# Altium PCB DriverControlsCarrierboard.PcbDoc
Units mm, origin at the board's own origin, x right, y up, seen from the top; angles counter-clockwise.
Board outline 50 x 50 mm, 2 copper layers (Top Layer, Bottom Layer); 12 components, 10 nets, 91 pads, 15 vias.
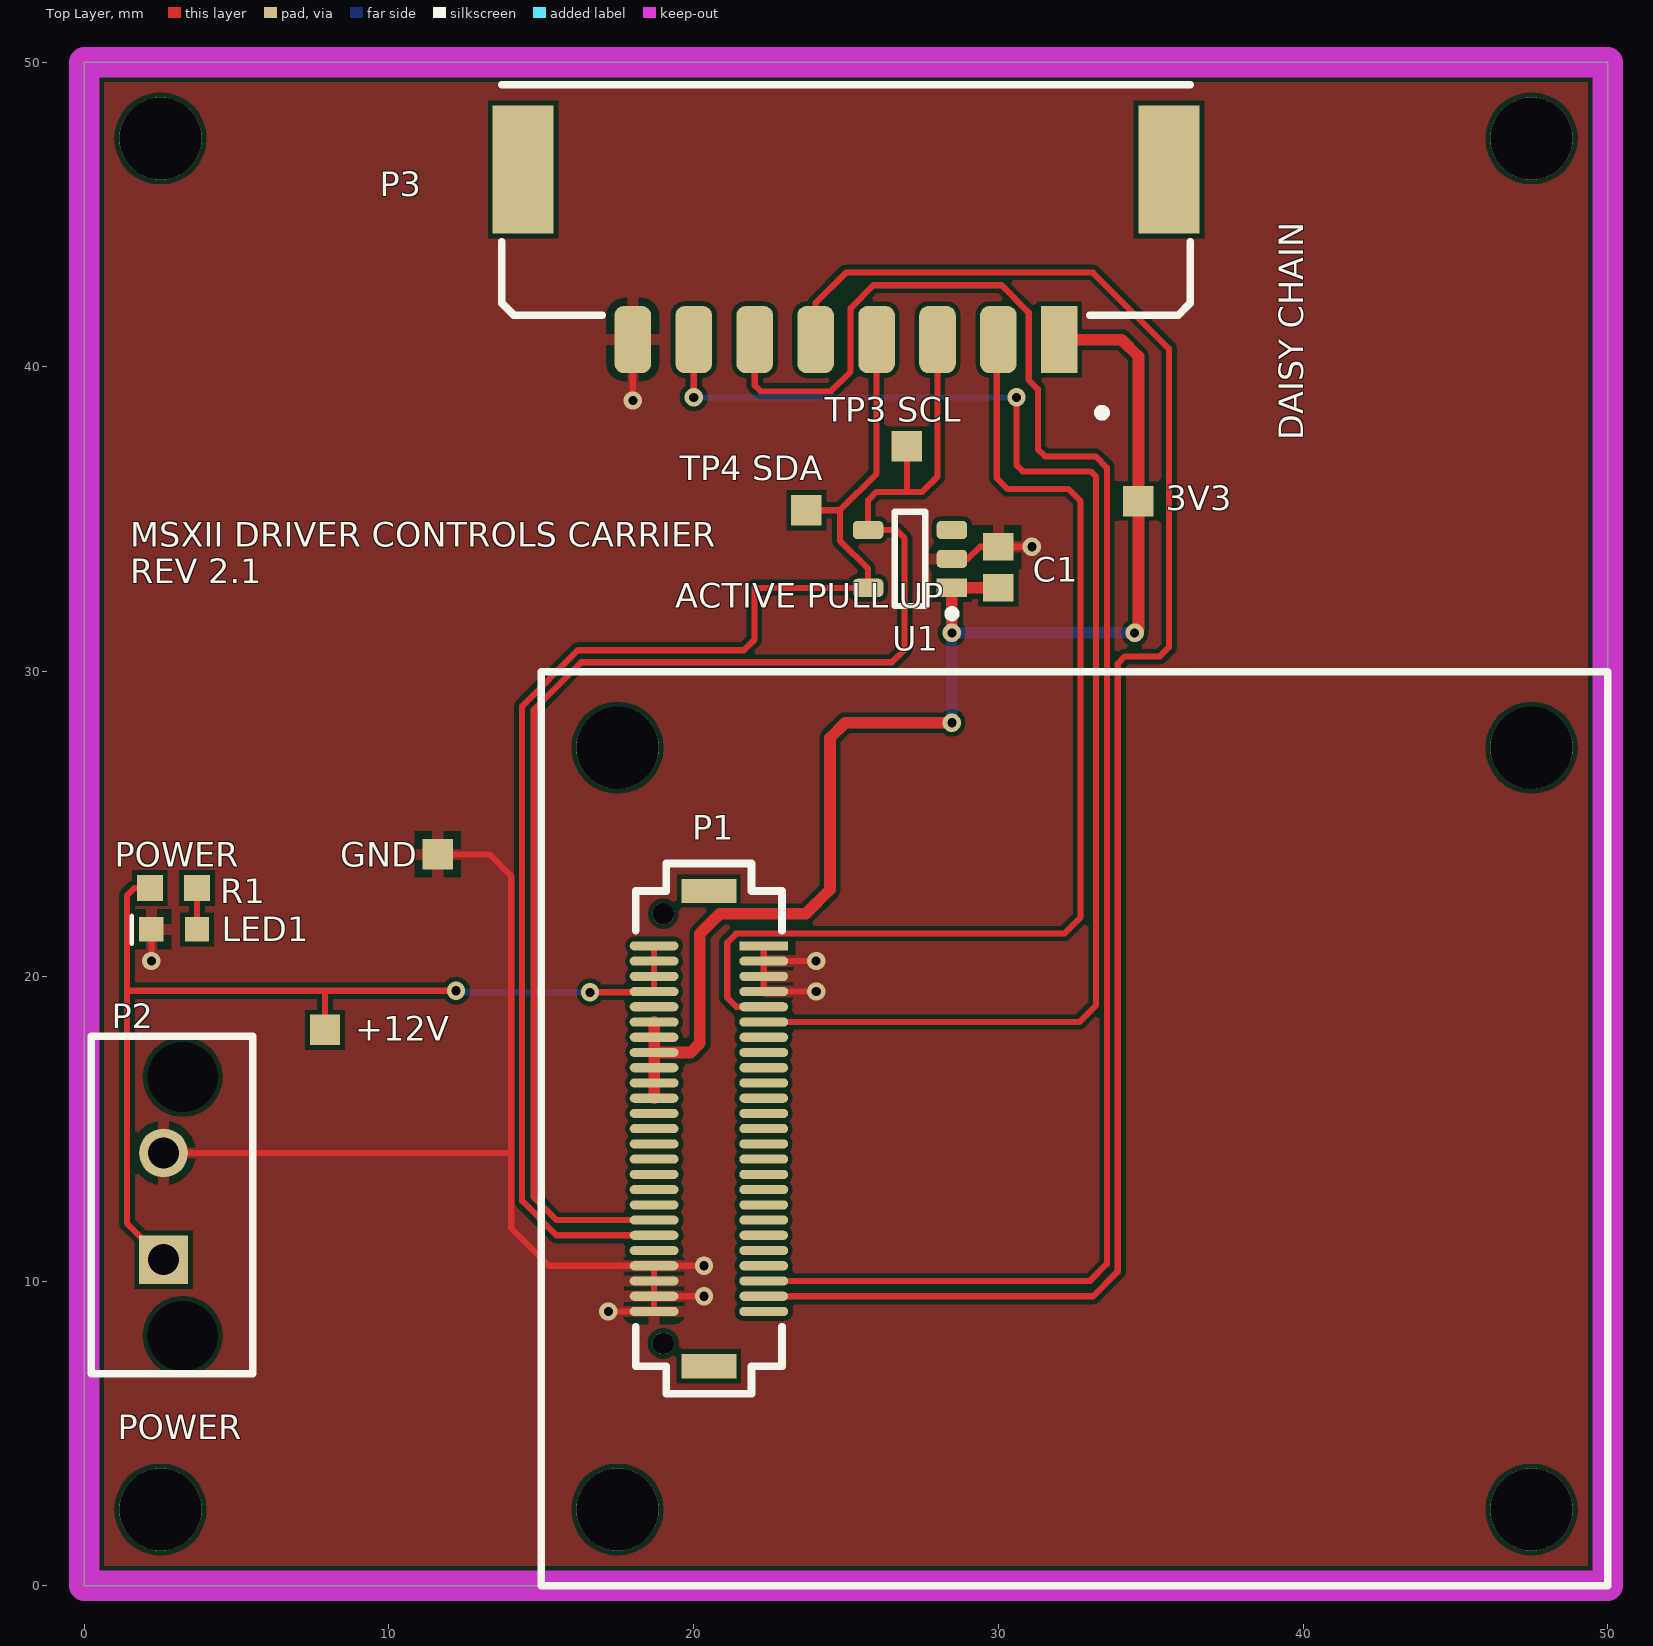
[diagram p0: Top Layer view]
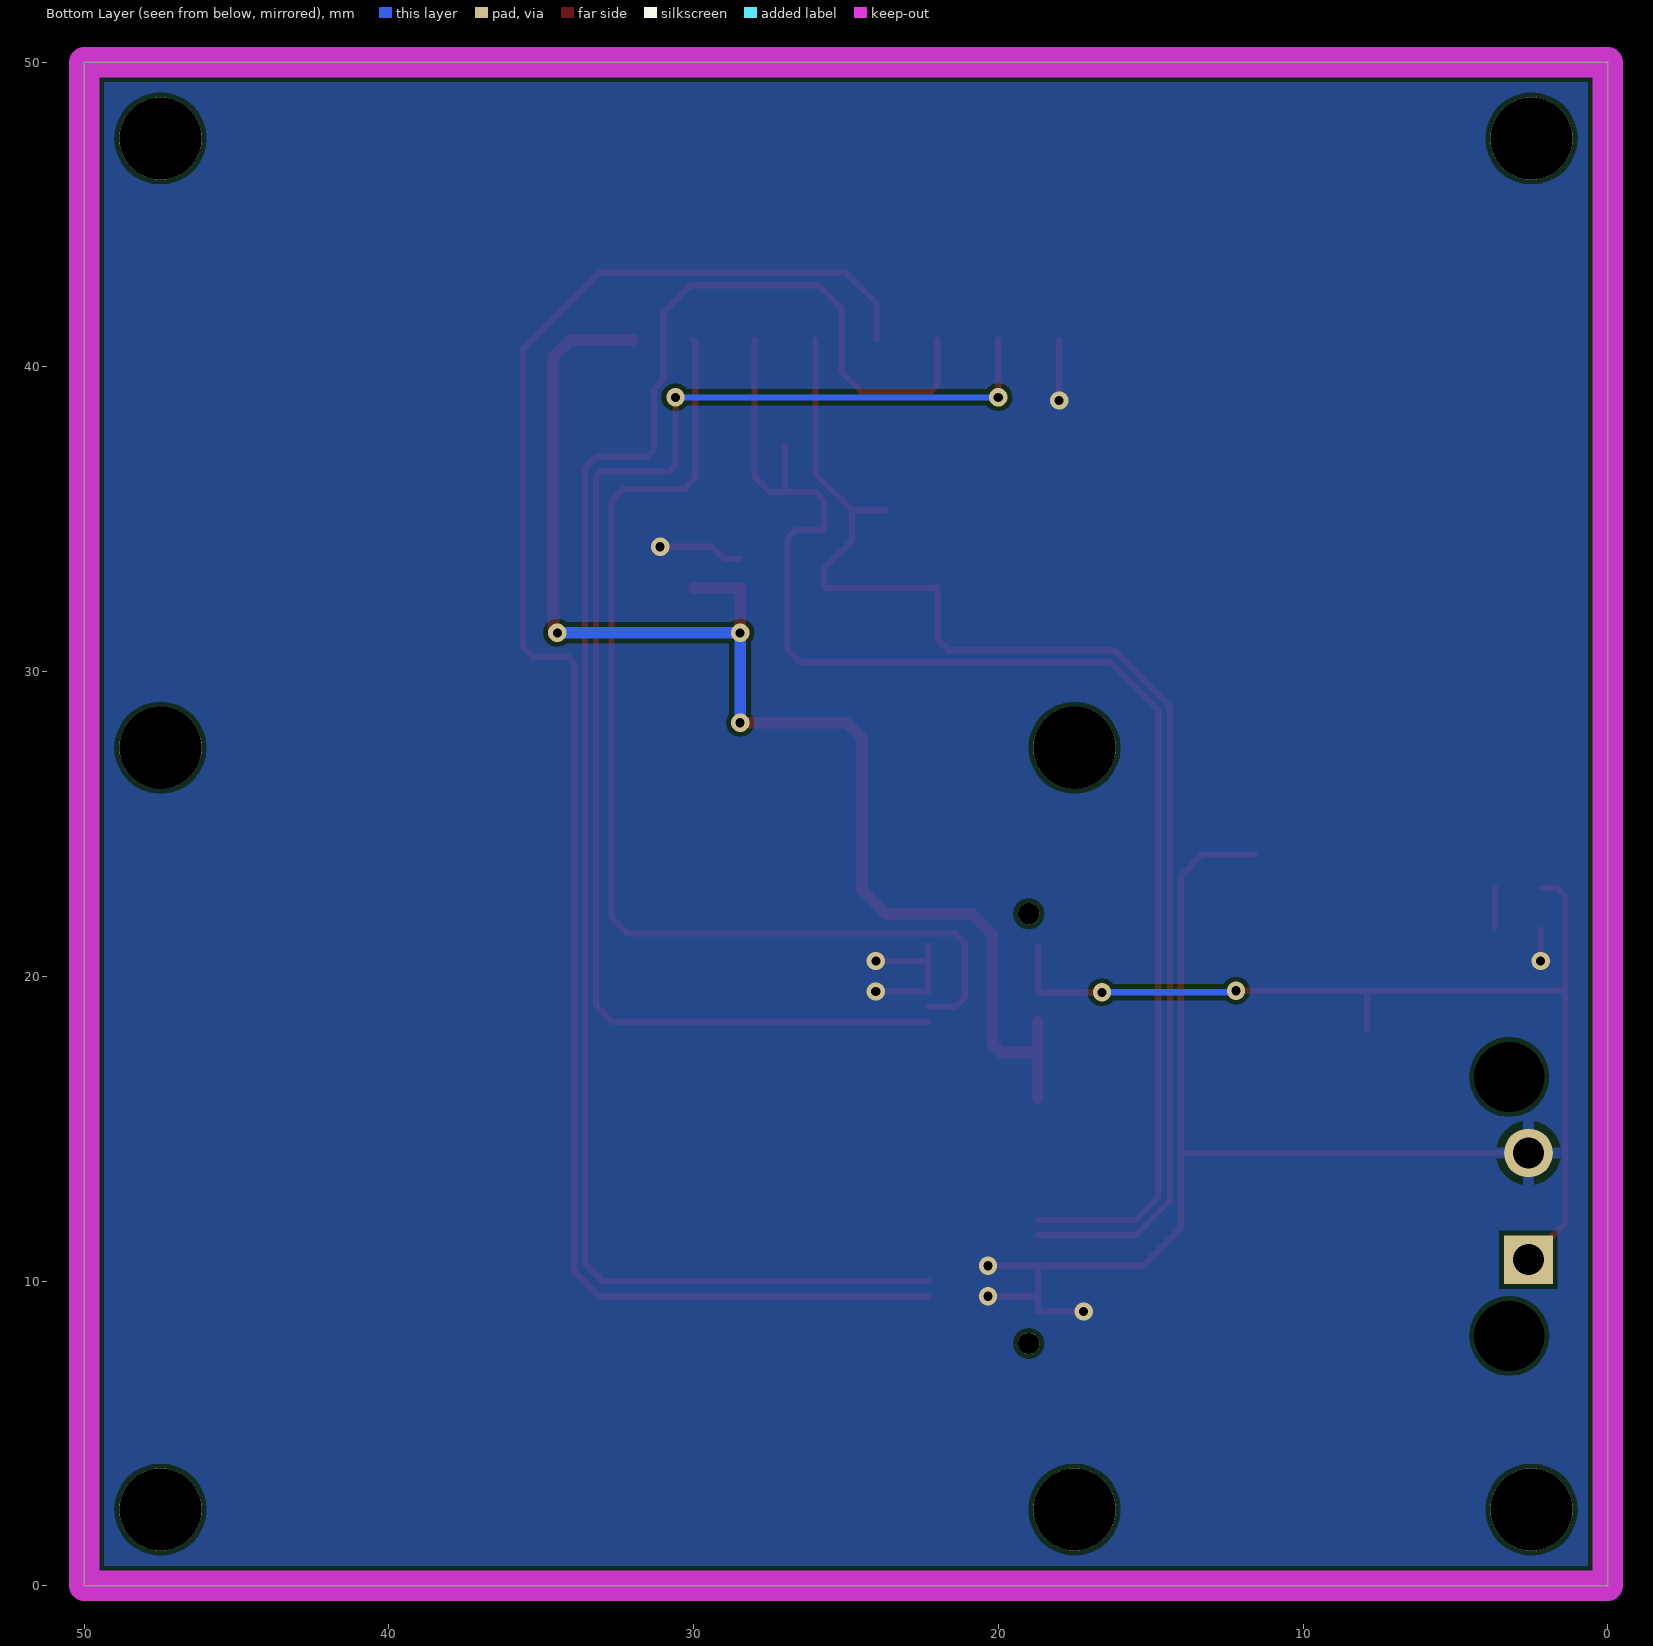
[diagram p1: Bottom Layer view, seen from below]
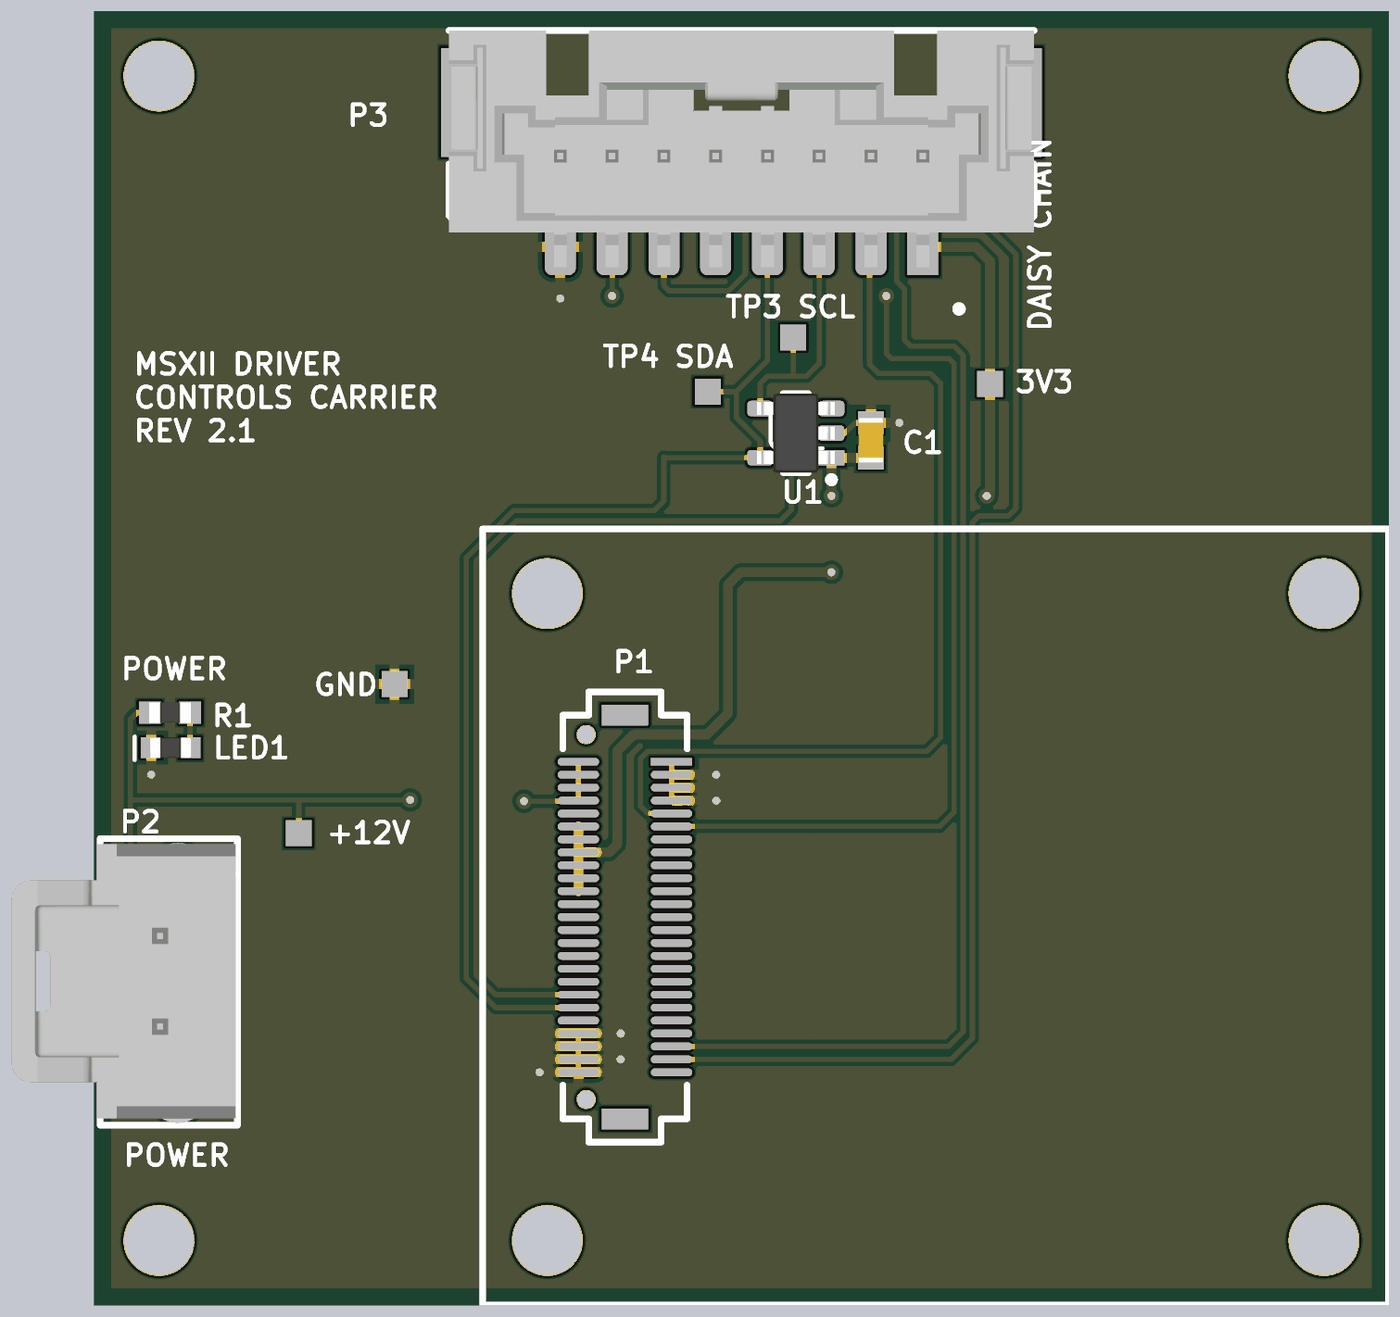
[diagram p2: 3D render of the assembled board from above, using the file's embedded part models]

## Layer stack, top to bottom
Top Solder: solder mask 0.0102, Solder Resist, Dk 3.5
Top Layer: signal copper 0.0356
Dielectric 1: dielectric 0.32, FR-4, Dk 4.8
Bottom Layer: signal copper 0.0356
Bottom Solder: solder mask 0.0102, Solder Resist, Dk 3.5

## Board outline
0,0 0,50 50,50 50,0

## Design rules (kind name [scope] priority, off if disabled: settings)
Clearance [All] p1: gap=0.152 ignorepadtopadclearanceinfootprint=FALSE except(0: Arc-Hole Track-Hole SMDPad-Hole THPad-Hole Via-Hole Fill-Hole Poly-Hole Region-Hole Text-Hole)
DiffPairsRouting [All] p1: maxlimit=0.254 minlimit=0.254 mostfreqgap=0.254 toplayer_minwidth=0.229 toplayer_maxwidth=0.381 toplayer_prefwidth=0.254 bottomlayer_minwidth=0.229 bottomlayer_maxwidth=0.381 bottomlayer_prefwidth=0.254 maxuncoupledlength=12.7
PasteMaskExpansion [All] p1 off: expansion=0
PolygonConnect PolygonConnect_1 [IsPad and not InNet('NetD2_2')and not InNet('NetLED3_2')] p1: connectstyle=Relief reliefconductorwidth=0.381 reliefentries=4 polygonreliefangle="90 Angle" airgapwidth=0.254
PolygonConnect [Not(IsPad) or InNet('NetD2_2')or InNet('NetLED3_2')] p2: connectstyle=Direct reliefconductorwidth=0.254 reliefentries=4 polygonreliefangle="90 Angle" airgapwidth=0.254
RoutingVias [All] p1: holewidth=0.711 width=1.27 viastyle="Through Hole" minholewidth=0.711 minwidth=1.27 maxholewidth=0.711 maxwidth=1.27 useviatemplates=TRUE viatemplateguid#1={48103D11-5043-4B7C-B587-BFCD4296CF47} viatemplatename#1=v60h30m0mx0
SilkToBoardRegionClearance [All] p1 off:
SilkToSilkClearance [All] p1 off: silktosilkclearance=0.254
SilkToSolderMaskClearance [IsPad] p1 off: minsilkscreentomaskgap=0.254 clearancetoexposedcopper=TRUE
SolderMaskExpansion [All] p1: expansion=0.102
Width [All] p1: maxlimit=2.54 minlimit=0.203 preferedwidth=0.203
25 further rules are at their usual default settings.

## Classes and differential pairs
component class DriverControlsCarrierBoardMezzanine: P1

## Components (designator, comment, footprint, x,y, rotation, side; value= is the part's Value field where it differs from the comment)
3V3 "Test Point" "Test Point" 34.6,35.6 r90 top (schematic designator TP2)
+12V "Test Point" "Test Point" 7.9,18.241 r90 top (schematic designator TP1)
"ACTIVE PULL UP" "IC ACCELERATOR I2C 1CH TSOT23-5" "IC OP AMP GP RR 10MHZ SOT-23-5" 27.1,33.7 r180 top (schematic designator U1)
C1 "CAP CER 0.1UF 50V 10% X7R 0603" "CAP, 0603" 30,33.425 r90 top
GND "Test Point" "Test Point" 11.6,24 r0 top (schematic designator TP5)
LED1 "LED GREEN CLEAR 2V 0603" LED_0603 3.65,21.55 r180 top
P1 "CONN 50POS Bergstak Plug 0.02\"" "CONN, Bergstak 50 Pos Plug" 20.5,15 r0 top
P2 "CONN 2POS ULTRA-FIT 0.138\"" "CONN, 2POS ULTRA-FIT" 2.6,10.7 r90 top
P3 "CONN 8POS DURA-CLIK 0.079\"" "CONN, 8POS Dura-Clik" 32.003,40.9 r180 top
R1 "RES 4.7K OHM 1% 1/10W 0603" "RES, 0603" 2.925,22.9 r0 top
"TP3 SCL" "Test Point" "Test Point" 27,37.4 r180 top (schematic designator TP3)
"TP4 SDA" "Test Point" "Test Point" 23.7,35.3 r180 top (schematic designator TP4)

## Footprints (in the part's own frame and the unit in brackets; to place one, negate y for a bottom-side part, rotate by r counter-clockwise, add the part's x,y. Pads: shape width x height; smd on the part's side, far side on the other; paste and mask are expansions set on the pad)
"CAP, 0603" [mm] "Chip Capacitor, 2-Leads, Body 1.60x0.81mm, IPC Medium Density"
  rect 0.9x1 smd mask+0.076: 1(-0.675,0) 2(0.675,0)
  body extent -0.87,-0.48 0.87,0.48, height 0.9
"CONN, 2POS ULTRA-FIT" [mm] "2 Positions Header, Shrouded Connector 0.138\" (3.50mm) Through Hole Gold"
  rect 1.6x1.6 hole 1.02: 1(0,0)
  round 1.6 hole 1.02: 2(3.5,0)
  round 1.6 hole 2.3: ""(-2.5,-0.63) ""(6,-0.63)
  silkscreen extent -3.74,-2.93 7.33,2.37, body extent -3.48,-2.87 7.12,5.79, height 13.85
"CONN, 8POS Dura-Clik" [mm] "WM10868CT-ND"
  rect 1.2x2.2 smd: 1(0,0)
  rrect50% 1.2x2.2 smd: 2(2,0) 3(4,0) 4(6,0) 5(8,0) 6(10,0) 7(12,0) 8(14,0)
  rect 2x4.2 smd: ""(-3.6,-5.58) ""(17.6,-5.58)
  silkscreen extent -4.3,-8.36 18.3,2.53, body extent -4.3,-8.36 18.3,0.79, height 8.02
"CONN, Bergstak 50 Pos Plug" [mm] "Bergstak 50 Position Plug"
  rect 1.6x0.3 smd: 1(1.8,6)
  oval 1.6x0.3 smd: 2(1.8,5.5) 3(1.8,5) 4(1.8,4.5) 5(1.8,4) 6(1.8,3.5) 7(1.8,3) 8(1.8,2.5) 9(1.8,2) 10(1.8,1.5) 11(1.8,1) 12(1.8,0.5) 13(1.8,0) 14(1.8,-0.5) 15(1.8,-1) 16(1.8,-1.5) 17(1.8,-2) 18(1.8,-2.5) 19(1.8,-3) 20(1.8,-3.5) 21(1.8,-4) 22(1.8,-4.5) 23(1.8,-5) 24(1.8,-5.5) 25(1.8,-6) 26(-1.8,-6) 27(-1.8,-5.5) 28(-1.8,-5) 29(-1.8,-4.5) 30(-1.8,-4) 31(-1.8,-3.5) 32(-1.8,-3) 33(-1.8,-2.5) 34(-1.8,-2) 35(-1.8,-1.5) 36(-1.8,-1) 37(-1.8,-0.5) 38(-1.8,0) 39(-1.8,0.5) 40(-1.8,1) 41(-1.8,1.5) 42(-1.8,2) 43(-1.8,2.5) 44(-1.8,3) 45(-1.8,3.5) 46(-1.8,4) 47(-1.8,4.5) 48(-1.8,5) 49(-1.8,5.5) 50(-1.8,6)
  round 0.7 hole 0.7: ""(-1.5,-7.05) ""(-1.5,7.05)
  rect 1.8x0.8 smd: ""(0,-7.8) ""(0,7.8)
  silkscreen extent -2.4,-8.7 2.4,8.7
"IC OP AMP GP RR 10MHZ SOT-23-5" [mm] "SOT23, 5-Leads, Body 2.90x2.80mm, Pitch 0.95mm, IPC Medium Density"
  rect 1x0.6 smd: 1(-1.375,0.95)
  rrect50% 1x0.6 smd: 2(-1.375,0) 3(-1.375,-0.95) 4(1.375,-0.95) 5(1.375,0.95)
  silkscreen extent -1.5,-1.55 0.5,1.92, body extent -1.5,-1.53 1.5,1.53, height 1.45
LED_0603 [mm]
  rect 0.8x0.8 smd: 1(-0.05,0.01) 2(1.45,0.01)
  silkscreen extent 2.09,-0.43 2.09,0.48, body extent -0.1,-0.39 1.5,0.41, height 0.55
"RES, 0603" [mm] "Chip Resistor, 2-Leads, Body 1.60x0.80mm, IPC Medium Density"
  rect 0.85x0.85 smd: 1(-0.775,0) 2(0.775,0)
  body extent -0.8,-0.4 0.8,0.4, height 0.55
"Test Point" [mm]
  rect 1x1 smd: TP(0,0)

## Part data
"ACTIVE PULL UP": "Accelerator 1 Channel 400kHz TSOT-23-5", Base Part Number=LTC1694, Current - Supply=60µA, Manufacturer="Linear Technology/Analog Devices", Manufacturer Part Number=LTC1694CS5#TRMPBF, Operating Temperature="0°C ~ 70°C", Package / Case="SOT-23-5 Thin, TSOT-23-5", Supplier Device Package=TSOT-23-5, Supplier Part Number=LTC1694CS5, Supplier Part Number 1=LTC1694CS5#TRMPBFCT-ND, Voltage - Supply="2.7 V ~ 6 V", Applications=I²C, Category="Integrated Circuits (ICs)", ComponentLink1Description=http://www.linear.com/docs/3505, ComponentLink1URL=http://www.linear.com/docs/3505, Data Rate (Max)=400kHz, Delay Time=-, Input="2-Wire Bus", Number of Channels=1, Output="2-Wire Bus", Packaging="Cut Tape (CT)", Part Status=Active, Pricing 1="1=4.79, 25=4.278, 100=2.5493, 250=2.33692 (CAD)", RoHS="RoHS Compliant", Signal Conditioning=-, Stock 1=794, Supplier 1=Digi-Key, Type=Accelerator
C1: "0.10µF ±10% 50V Ceramic Capacitor X7R 0603 (1608 Metric)", Capacitance=0.1µF, Manufacturer 1="AVX Corporation", Manufacturer Part Number 1=06035C104KAT2A, Operating Temperature="-55°C ~ 125°C", Package / Case="0603 (1608 Metric)", Ratings=-, Supplier Part Number 1=478-5052-1-ND, Temperature Coefficient=X7R, Tolerance=±10%, Voltage=50V, ComponentLink1Description=http://datasheets.avx.com/X7RDielectric.pdf, ComponentLink1URL=http://datasheets.avx.com/X7RDielectric.pdf, Height - Seated (Max)=-, Lead Spacing=-, Lead Style=-, Mounting Type="Surface Mount, MLCC", Packaging="Cut Tape (CT)", Part Status=Active, Size / Dimension="0.063\" L x 0.032\" W (1.60mm x 0.81mm)", Supplier 1=Digi-Key, Thickness (Max)="0.035\" (0.90mm)"
LED1: "Green 572nm LED Indication - Discrete 2V 0603 (1608 Metric)", Color=Green, Current - Test=20mA, Lens Color=Colorless, Manufacturer="Wurth Electronics Inc.", Manufacturer Part Number=150060VS75000, Millicandela Rating=40mcd, Package / Case="0603 (1608 Metric)", Supplier Device Package=0603, Supplier Part Number 1=732-4980-1-ND, Voltage - Forward (Vf) (Typ)=2V, Category=Optoelectronics, ComponentLink1Description=http://katalog.we-online.de/led/datasheet/150060VS75000.pdf, ComponentLink1URL=http://katalog.we-online.de/led/datasheet/150060VS75000.pdf, Features=-, Height (Max)=0.80mm, Lens Style/Size="Rectangle with Flat Top, 1.10mm x 0.70mm", Lens Transparency=Clear, Mounting Type="Surface Mount", Packaging="Cut Tape (CT)", Part Status=Active, Pricing 1="1=0.21, 100=0.1617, 500=0.13964 (CAD)", RoHS="RoHS Compliant", Size / Dimension="1.60mm L x 0.80mm W", Stock 1=9408, Supplier 1=Digi-Key, Viewing Angle=140°, Wavelength - Dominant=570nm, Wavelength - Peak=572nm
P1: "50 Position Connector Plug, Outer Shroud Contacts Surface Mount Gold", Manufacturer 1="Amphenol FCI", Manufacturer Part Number 1=10132797-055100LF, Supplier Part Number 1=609-5226-1-ND, ComponentLink1Description=http://portal.fciconnect.com/Comergent//fci/drawing/10132797.pdf, ComponentLink1URL=http://portal.fciconnect.com/Comergent//fci/drawing/10132797.pdf, Connector Type="Plug, Outer Shroud Contacts", Contact Finish=Gold, Contact Finish Thickness="1µin (0.025µm)", Height Above Board="0.169\" (4.30mm)", Mated Stacking Heights=5mm, Mounting Type="Surface Mount", Number of Positions=50, Number of Rows=2, Packaging="Cut Tape (CT)", Part Status=Active, Pitch="0.020\" (0.50mm)", Series="BergStak Plug", Supplier 1=Digi-Key
P2: "2 Positions Header, Shrouded Connector 0.138\" (3.50mm) Through Hole Gold", Current Rating=-, Insulation Color=Black, Manufacturer 1="Molex, LLC", Manufacturer Part Number 1=1722861302, Material Flammability Rating="UL94 V-0", Operating Temperature="-40°C ~ 120°C", Supplier Part Number 1=WM11673-ND, Voltage=400V, ComponentLink1Description=http://www.molex.com/pdm_docs/sd/1722861302_sd.pdf, ComponentLink1URL=http://www.molex.com/pdm_docs/sd/1722861302_sd.pdf, Connector Type=Header, Contact Finish - Mating=Gold, Contact Finish - Post=Tin, Contact Finish Thickness - Mating="30µin (0.76µm)", Contact Finish Thickness - Post="60µin (1.52µm)", Contact Length - Mating=-, Contact Length - Post="0.126\" (3.20mm)", Contact Material="Copper Alloy", Contact Shape=Square, Contact Type="Male Pin", Fastening Type="Latch Holder", Ingress Protection=-, Insulation Height="0.465\" (11.80mm)", Insulation Material="Liquid Crystal Polymer (LCP)", Mated Stacking Heights=26.99mm, Mounting Type="Through Hole", Number of Positions=2, Number of Positions Loaded=All, Number of Rows=1, Overall Contact Length=-, Packaging=Tray, Part Status=Active, Pitch - Mating="0.138\" (3.50mm)", Row Spacing - Mating=-, Series=UltraFit, Shrouding="Shrouded - 4 Wall", Style="Board to Board or Cable", Supplier 1=Digi-Key, Termination="Kinked Pin, Solder"
P3: "8 Positions Header Connector 0.079\" (2.00mm) Surface Mount Tin", Current Rating=-, Insulation Color=Natural, Manufacturer 1="Molex, LLC", Manufacturer Part Number 1=5600200820, Supplier Part Number 1=WM10868CT-ND, ComponentLink1Description=http://www.molex.com/pdm_docs/sd/5600200820_sd.pdf, ComponentLink1URL=http://www.molex.com/pdm_docs/sd/5600200820_sd.pdf, Connector Type=Header, Contact Finish - Mating=Tin, Contact Finish - Post=Tin, Contact Finish Thickness - Mating=-, Contact Finish Thickness - Post=-, Contact Length - Mating=-, Contact Length - Post=-, Contact Material="Copper Alloy", Contact Shape=Square, Contact Type="Male Pin", Fastening Type="Latch Lock", Ingress Protection=-, Insulation Height="0.315\" (8.00mm)", Insulation Material="Polyamide (PA), Nylon", Mated Stacking Heights=9.3mm, Material Flammability Rating=-, Mounting Type="Surface Mount", Number of Positions=8, Number of Positions Loaded=All, Number of Rows=1, Operating Temperature=-, Overall Contact Length=-, Packaging="Cut Tape (CT)", Part Status=Active, Pitch - Mating="0.079\" (2.00mm)", Row Spacing - Mating=-, Series=DuraClik, Shrouding="Shrouded - 4 Wall", Style="Board to Cable/Wire", Supplier 1=Digi-Key, Termination=Solder, Voltage=-
R1: "4.7k Ohm ±1% 0.1W, 1/10W Chip Resistor 0603 (1608 Metric) Moisture Resistant Thick Film", Manufacturer 1=Yageo, Manufacturer Part Number 1=RC0603FR-074K7L, Operating Temperature="-55°C ~ 155°C", Package / Case="0603 (1608 Metric)", Power (Watts)=1/10W, Resistance (Ohms)=4.7k, Supplier Device Package=0603, Supplier Part Number 1=311-4.70KHRCT-ND, Temperature Coefficient=±100ppm/°C, Tolerance=±1%, Category=Resistors, ComponentLink1Description=http://www.yageo.com/documents/recent/PYu-RC_Group_51_RoHS_L_7.pdf, ComponentLink1URL=http://www.yageo.com/documents/recent/PYu-RC_Group_51_RoHS_L_7.pdf, Composition="Thick Film", Description 1="RES SMD 4.7K OHM 1% 1/10W 0603", Failure Rate=-, Features="Moisture Resistant", Height - Seated (Max)="0.022\" (0.55mm)", Packaging="Cut Tape (CT)", Part Status=Active, Pricing 1="1=0.16, 10=0.022, 100=0.0089, 1000=0.00402, 2500=0.00349 (CAD)", RoHS="RoHS Compliant", Size / Dimension="0.063\" L x 0.031\" W (1.60mm x 0.80mm)", Stock 1=3487566, Supplier 1=Digi-Key

## Free pads (board coordinates)
  round 2.7 hole 2.7: ""(2.5,2.5) ""(2.5,47.5) ""(17.5,2.5) ""(17.5,27.5) ""(47.5,2.5) ""(47.5,27.5) ""(47.5,47.5)

## Via types
v1: diameter 0.6, hole 0.3, Top Layer to Bottom Layer, tented both sides, 15 vias

## Nets (pads, with @x,y where several pads share a name; then routed paths per layer and width w, separated by ;. In a path a pad name is that pad's centre, name@x,y a point inside that pad or via, vN(x,y) a via of type N, cw(c..) or ccw(c..) an arc to the next point about the centre after c; other vN are vias at no path point)
+3V3: 3V3.TP "ACTIVE PULL UP.1" C1.1 P1.40 P1.41 P1.42 P1.43 P1.44 P1.45 P3.1 | length 45.7
  Top Layer w0.203: P3.1@32,40.897 P3.1
  Top Layer w0.381: P1.40 P1.41 ; P1.45 P1.44 P1.43 ; P1.41@18.725,16.475 P1.41 ; v1(28.475,28.325) 24.975,28.325 24.475,27.825 24.475,22.85 23.682,22.057 20.857,22.057 20.2,21.4 20.2,17.8 19.9,17.5 P1.43 ; v1(28.475,31.275) 28.475,32.75 C1.1 ; P3.1@32,40.897 34.046,40.897 34.6,40.343 3V3.TP 34.6,31.4 v1(34.475,31.275) ; P1.41 P1.42 P1.43
  Bottom Layer w0.381: v1(28.475,28.325) v1(28.475,31.275) v1(34.475,31.275)
+12V: +12V.TP P1.47 P1.48 P1.49 P1.50 P2.1 R1.1 | length 33.4
  Top Layer w0.203: R1.1 1.648,22.9 1.4,22.652 1.4,19.525 ; P2.1 1.4,11.9 1.4,19.525 ; +12V.TP 7.9,19.525 ; v1(12.2,19.525) 7.9,19.525 ; v1(16.6,19.475) 18.675,19.475 P1.47 P1.48 P1.49 P1.50 ; 1.4,19.525 7.9,19.525
  Bottom Layer w0.203: v1(12.2,19.525) 12.25,19.475 v1(16.6,19.475)
GND: "ACTIVE PULL UP.2" C1.2 GND.TP LED1.2 P1.1 P1.2 P1.3 P1.4 P1.26 P1.27 P1.28 P1.29 P2.2 P3.8 | length 47.9
  Top Layer w0.203: v1(2.2,20.505) LED1.2 ; P2.2 14.014,14.2 ; GND.TP 13.3,24 14.014,23.286 14.014,14.2 ; v1(17.2,9) P1.26 P1.27 ; v1(18.003,38.903) P3.8 ; v1(20.336,9.5) P1.27 ; v1(20.336,10.5) P1.29 ; P1.1 P1.2 ; v1(24.02,20.5) P1.2 ; v1(24.025,19.5) P1.4 P1.3 P1.2 ; 28.475,33.7 29,33.7 29.4,34.1 C1.2 v1(31.1,34.1) ; 14.014,14.2 14.014,11.73 15.244,10.5 P1.29 ; P1.27 P1.28 P1.29
NetLED1_1: LED1.1 R1.2 | length 1.3
  Top Layer w0.203: LED1.1@3.7,21.6 R1.2
PA1/STEERING_ADC_READY: P1.24 P3.5 | length 57.9
  Top Layer w0.203: P1.24 33.109,9.5 33.921,10.312 33.921,30.266 34.155,30.5 35.3,30.5 35.6,30.8 35.6,40.6 33.1,43.1 25,43.1 24.003,42.103 P3.5
PA2/STEERING_IO_INTERRUPT: P1.23 P3.6 | length 58.4
  Top Layer w0.203: P3.6 22.003,39.397 22.2,39.2 24.5,39.2 25.149,39.849 25.149,41.929 25.9,42.68 30.106,42.68 31,41.787 31,39.571 31.3,39.271 31.3,37.306 31.539,37.067 33.199,37.067 33.565,36.7 33.565,10.559 33.006,10 P1.23
PA9/CONSOLE_IO_INTERRUPT: P1.6 P3.7 | length 46
  Top Layer w0.203: v1(20.003,39.003) P3.7 ; P1.6 32.656,18.5 33.21,19.054 33.21,36.39 33.027,36.573 30.8,36.573 30.597,36.777 v1(30.597,39.003)
  Bottom Layer w0.203: v1(20.003,39.003) v1(30.597,39.003)
PA10/PEDAL_ADC_READY: P1.5 P3.2 | length 36.4
  Top Layer w0.203: P1.5 21.4,19 21.1,19.3 21.1,21.109 21.395,21.404 32.162,21.404 32.7,21.942 32.7,35.601 32.301,36 30.3,36 29.946,36.354 29.946,40.843 P3.2
PB8/I2C1_SCL: "ACTIVE PULL UP.4" "TP3 SCL.TP" P1.32 P3.3 | length 47.8
  Top Layer w0.203: P1.32 15.5,12 14.75,12.75 14.75,28.75 16.308,30.308 26.508,30.308 26.925,30.725 26.925,34.375 26.65,34.65 25.725,34.65 25.725,35.625 26,35.9 27,35.9 ; 27,37.4 27,35.9 ; P3.3 28.003,36.403 27.5,35.9 27,35.9
PB9/I2C1_SDA: "ACTIVE PULL UP.5" "TP4 SDA.TP" P1.31 P3.4 | length 45.2
  Top Layer w0.203: P1.31 15.497,11.5 14.369,12.628 14.369,28.872 16.203,30.706 21.65,30.706 22,31.056 22,32.775 22.025,32.75 25.725,32.75 25.725,33.375 24.8,34.3 24.8,35.3 ; 23.7,35.3 24.8,35.3 ; P3.4 26.003,36.503 24.8,35.3
pads on no net: "ACTIVE PULL UP.3" P1. P1.7 P1.8 P1.9 P1.10 P1.11 P1.12 P1.13 P1.14 P1.15 P1.16 P1.17 P1.18 P1.19 P1.20 P1.21 P1.22 P1.25 P1.30 P1.33 P1.34 P1.35 P1.36 P1.37 P1.38 P1.39 P1.46 P2. P3.

## Polygon pours and split planes (outlines as drawn)
GND on Top Layer "GND_L01_P012" (solid, pour order 12): 0,50 50,50 50,0 0,0
GND on Bottom Layer "GND_L02_P014" (solid, pour order 14): 0,50 49.8,50 50,49.8 50,0 0,0

## Keep-outs
Keep-Out Layer:
  the board outline again, w1

## Silkscreen, mask and mechanical layers (free items; w line width, h text height)
Top Overlay:
  lines w0.254: 15,0 15,30 50,30 50,0 15,0
  text "DAISY CHAIN" at 40,37.6 h0.8 r90
  text "MSXII DRIVER CONTROLS CARRIER / REV 2.1" at 1.5,32.9 h0.8
  text "U1" at 26.518,30.684 h0.8
  text "POWER" at 1,23.6 h0.8
  text "POWER" at 1.1,4.8 h0.8